# Altium PCB Helli5.PcbDoc
Units mm, origin at the board's own origin, x right, y up, seen from the top; angles counter-clockwise.
Board outline 89.66 x 105.54 mm, 2 copper layers (Top Layer, Bottom Layer); 35 components, 51 nets, 168 pads, 0 vias.
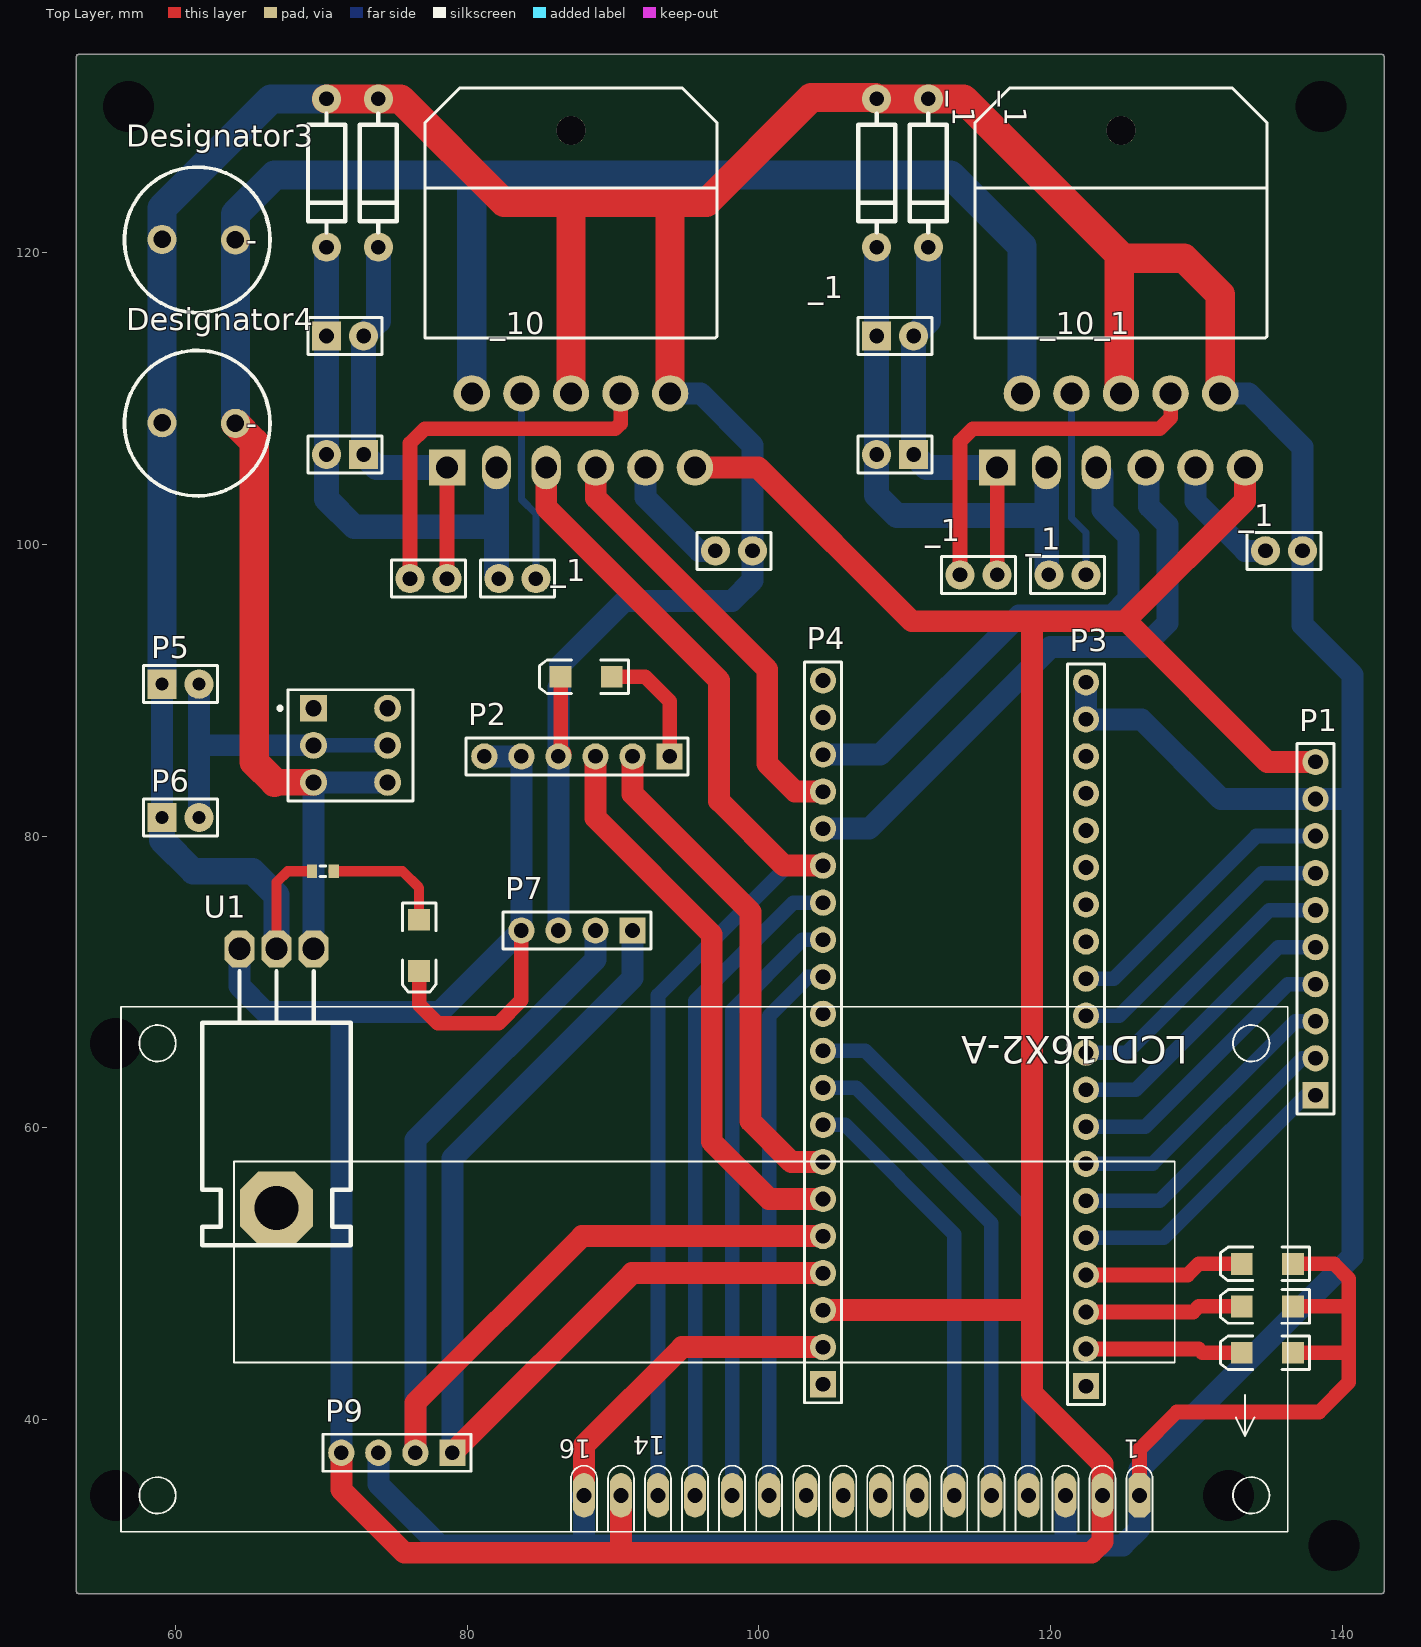
[diagram p0: Top Layer view]
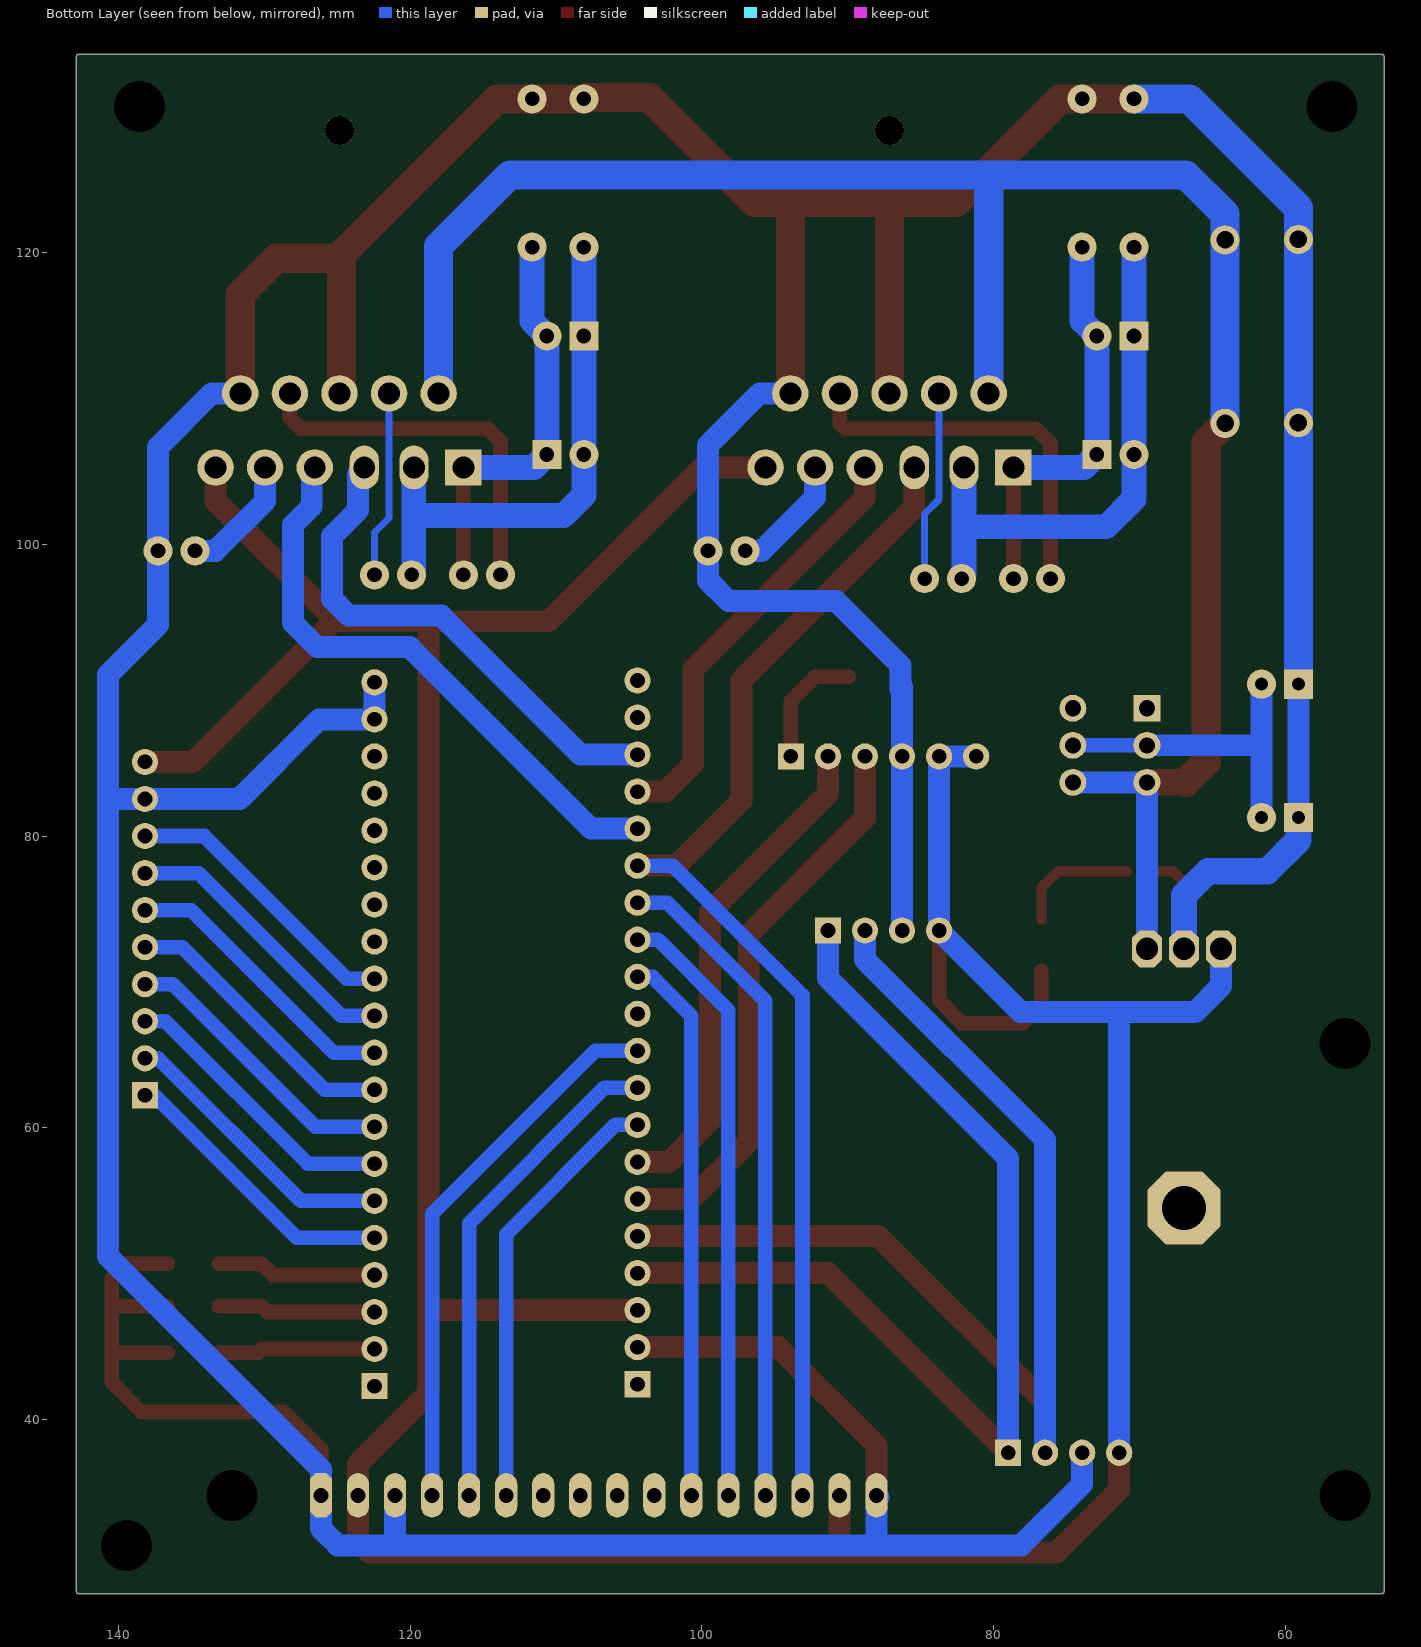
[diagram p1: Bottom Layer view, seen from below]

## Layer stack, top to bottom
Top Solder: solder mask 0.0102, Solder Resist, Dk 3.5
Top Layer: signal copper 0.0356
Dielectric 1: dielectric 0.32, FR-4, Dk 4.8
Bottom Layer: signal copper 0.0356
Bottom Solder: solder mask 0.0102, Solder Resist, Dk 3.5

## Board outline
53.213,28.194 ccw(c53.34,28.194) 53.34,28.067 142.748,28.067 ccw(c142.748,28.194) 142.875,28.194 142.875,133.477 ccw(c142.748,133.477) 142.748,133.604 53.34,133.604 ccw(c53.34,133.477) 53.213,133.477

## Design rules (kind name [scope] priority, off if disabled: settings)
Clearance [All] p1: gap=0.254 ignorepadtopadclearanceinfootprint=FALSE except(0: Arc-Hole Track-Hole SMDPad-Hole THPad-Hole Via-Hole Fill-Hole Poly-Hole Region-Hole Text-Hole)
PolygonConnect [All] p1: connectstyle=Relief reliefconductorwidth=0.254 reliefentries=4 polygonreliefangle="90 Angle" airgapwidth=0.254
RoutingVias [All] p1: holewidth=0.711 width=1.27 viastyle="Through Hole" minholewidth=0.711 minwidth=1.27 maxholewidth=0.711 maxwidth=1.27
SolderMaskExpansion [All] p1: expansion=0.102
Width Width_1 [(InNet('GND') OR InNet('VCC') OR InNet('VSS'))] p1: maxlimit=2 minlimit=0.1 preferedwidth=1.6
Width [All] p2: maxlimit=2 minlimit=0.1 preferedwidth=1
30 further rules are at their usual default settings.

## Classes and differential pairs
component class Sheet1: P1 P2 P4 P5 P6 P7 P9

## Components (designator, comment, footprint, x,y, rotation, side; value= is the part's Value field where it differs from the comment)
_1 "" DIODE0.4#1 108.077,130.556 r270 top
_1 "" DIODE0.4#2 111.633,130.556 r270 top
_1 "Header 2" HDR1X2#1 110.617,106.172 r180 top
_1 "Header 2" HDR1X2#2 108.077,114.3 r0 top
_1 "Cap" RAD-0.1#1 115.071,97.917 r0 top
_1 "Cap" RAD-0.1#2 121.167,97.917 r0 top
_1 "Cap" RAD-0.1#3 136.017,99.568 r0 top
_10 "MOTOR4" "L6203 SL" 87.122,116.84 r180 top
_10_1 "MOTOR4" "L6203 SL" 124.841,116.84 r180 top
Designator3 "Comment" "MY_CAP_POL 10MM" 61.595,120.904 r0 top
Designator4 "Comment" "MY_CAP_POL 10MM" 61.595,108.331 r0 top
P1 "Header 10" HDR1X10 138.176,62.23 r90 top
P2 "bluetooth" HDR1X6 93.882,85.471 r180 top
P3 "Header 20" HDR1X20 122.437,42.291 r90 top
P4 "Header 20" HDR1X20 104.405,42.418 r90 top
P5 "Header 2" HDR1X2#3 59.078,90.424 r0 top
P6 "Header 2" HDR1X2#3 59.078,81.28 r0 top
P7 "Header 4" HDR1X4 91.342,73.533 r180 top
P9 "Oled Dispaly" HDR1X4 78.994,37.719 r180 top
U1 "7805" My_TO-220 69.456,72.263 r180 top
? "Comment" 3.2X1.6X1.1 134.874,50.673 r180 top
? "Comment" 3.2X1.6X1.1 134.874,47.752 r180 top
? "Comment" 3.2X1.6X1.1 134.874,44.577 r180 top
? "Comment" 3.2X1.6X1.1 88.166,90.932 r180 top
? "Comment" J1-0603 70.104,77.597 r180 top
? "Comment" 3.2X1.6X1.1 76.708,72.517 r270 top
? "Comment" "My_LCD 16x2-A" 126.111,34.798 r180 top
? "" DIODE0.4#1 70.358,130.556 r270 top
? "" DIODE0.4#2 73.914,130.556 r270 top
? "Header 2" HDR1X2#1 72.898,106.172 r180 top
? "Header 2" HDR1X2#2 70.358,114.3 r0 top
? "Cap" RAD-0.1#1 77.352,97.663 r180 top
? "Cap" RAD-0.1#2 83.448,97.663 r0 top
? "Cap" RAD-0.1#3 98.298,99.568 r0 top
? "Comment" DPDT-6 72.009,86.233 r0 top

## Footprints (in the part's own frame and the unit in brackets; to place one, negate y for a bottom-side part, rotate by r counter-clockwise, add the part's x,y. Pads: shape width x height; smd on the part's side, far side on the other; paste and mask are expansions set on the pad)
3.2X1.6X1.1 [mm] "SMT LED; 2 Flat Leads"
  rect 1.5x1.5 smd: 1(-1.75,0) 2(1.75,0)
  silkscreen extent -2.9,-1.15 3.2,1.15
DIODE0.4#1 [mm]
  round 2 hole 1: 149(10.16,0) 150(0,0)
  silkscreen extent 1.02,-1.27 9.14,1.27
DIODE0.4#2 [mm]
  round 2 hole 1: 143(0,0) 144(10.16,0)
  silkscreen extent 1.02,-1.27 9.14,1.27
DPDT-6 [mm] "Switch; 6 Leads"
  rect 1.85x1.85 hole 1.1: 1(-2.54,2.54)
  round 1.85 hole 1.1: 2(-2.54,0) 3(-2.54,-2.54) 4(2.54,-2.54) 5(2.54,0) 6(2.54,2.54)
  silkscreen extent -4.96,-3.81 4.28,3.81
HDR1X2#1 [mm]
  rect 2x2 hole 1: 95(0,0)
  round 2 hole 1: 96(2.54,0)
  silkscreen extent -1.27,-1.27 3.81,1.27
HDR1X2#2 [mm]
  rect 2x2 hole 1: 93(0,0)
  round 2 hole 1: 94(2.54,0)
  silkscreen extent -1.27,-1.27 3.81,1.27
HDR1X2#3 [mm] "Connector; Header; 2 Position"
  rect 2x2 hole 0.9: 1(0,0)
  round 2 hole 0.9: 2(2.54,0)
  silkscreen extent -1.27,-1.27 3.81,1.27
HDR1X4 [mm] "Connector; Header; 4 Position"
  rect 1.8x1.8 hole 1: 1(0,0)
  round 1.8 hole 1: 2(2.54,0) 3(5.08,0) 4(7.62,0)
  silkscreen extent -1.27,-1.27 8.89,1.27
HDR1X6 [mm] "Connector; Header; 6 Position"
  rect 1.8x1.8 hole 1: 1(0,0)
  round 1.8 hole 1: 2(2.54,0) 3(5.08,0) 4(7.62,0) 5(10.16,0) 6(12.7,0)
  silkscreen extent -1.27,-1.27 13.97,1.27
HDR1X10 [mm] "Connector; Header; 10 Position"
  rect 1.8x1.8 hole 1: 1(0,0)
  round 1.8 hole 1: 2(2.54,0) 3(5.08,0) 4(7.62,0) 5(10.16,0) 6(12.7,0) 7(15.24,0) 8(17.78,0) 9(20.32,0) 10(22.86,0)
  silkscreen extent -1.27,-1.27 24.13,1.27
HDR1X20 [mm] "Connector; Header; 20 Position"
  rect 1.8x1.8 hole 1: 1(0,0)
  round 1.8 hole 1: 2(2.54,0) 3(5.08,0) 4(7.62,0) 5(10.16,0) 6(12.7,0) 7(15.24,0) 8(17.78,0) 9(20.32,0) 10(22.86,0) 11(25.4,0) 12(27.94,0) 13(30.48,0) 14(33.02,0) 15(35.56,0) 16(38.1,0) 17(40.64,0) 18(43.18,0) 19(45.72,0) 20(48.26,0)
  silkscreen extent -1.27,-1.27 49.53,1.27
J1-0603 [mm] "Chip Resistor, Body 1.6x0.8mm, IPC High Density"
  rect 0.7x0.9 smd: 1(-0.75,0) 2(0.75,0)
  silkscreen extent -0.2,-0.35 0.2,0.35, body extent -0.85,-0.48 0.85,0.48, height 0.9
"L6203 SL" [mm]
  round 2 hole 2: 0(0,-11.557)
  rect 2.5x2.5 hole 1.5: 1(8.5,11.557)
  round 2.5 hole 1.5: 2(6.8,6.477) 4(3.4,6.477) 6(0,6.477) 7(-1.7,11.557) 8(-3.4,6.477) 9(-5.1,11.557) 10(-6.8,6.477) 11(-8.5,11.557)
  oval 2x3 hole 1.5: 3(5.1,11.557) 5(1.7,11.557)
  silkscreen extent -10,-14.48 10,2.69
"MY_CAP_POL 10MM" [mm]
  round 2 hole 1.2: +(-2.517,0.02) -(2.517,-0.02)
  silkscreen extent -5.09,-5 4.89,4.98, body extent -5.13,-5.07 5.03,5.09, height 10.16
"My_LCD 16x2-A" [mil]
  oct 60x120 hole 40: 1(0,0)
  oval 60x120 hole 40: 2(100,0) 3(200,0) 4(300,0) 5(400,0) 6(500,0) 7(600,0) 8(700,0) 9(800,0) 10(900,0) 11(1000,0) 12(1100,0) 13(1200,0) 14(1300,0) 15(1400,0) 16(1500,0)
  silkscreen extent -400,-1319 2750,98, body extent -299,-1331 2870,106, height 808
My_TO-220 [mil]
  oct 196.85x196.85 hole 118.11: 0(99.49,699.49)
  oct 80x100 hole 60: 1(-0.5,-0.5) 2(99.5,-0.5) 3(199.5,-0.5)
  silkscreen extent -101,60 300,800
RAD-0.1#1 [mm]
  round 2 hole 1: 91(1.27,0) 92(-1.27,0)
  silkscreen extent -2.54,-1.27 2.54,1.27
RAD-0.1#2 [mm]
  round 2 hole 1: 89(1.27,0) 90(-1.27,0)
  silkscreen extent -2.54,-1.27 2.54,1.27
RAD-0.1#3 [mm]
  round 2 hole 1: 87(1.27,0) 88(-1.27,0)
  silkscreen extent -2.54,-1.27 2.54,1.27

## Part data
P1: "Header, 10-Pin", LatestRevisionDate=17-Jul-2002, LatestRevisionNote="Re-released for DXP Platform.", Publisher="Altium Limited"
P2: library part "Header 6", "Header, 6-Pin", LatestRevisionDate=17-Jul-2002, LatestRevisionNote="Re-released for DXP Platform.", Publisher="Altium Limited"
P3 P4: "Header, 20-Pin", LatestRevisionDate=17-Jul-2002, LatestRevisionNote="Re-released for DXP Platform.", Publisher="Altium Limited"
P5 P6: "Header, 2-Pin", LatestRevisionDate=17-Jul-2002, LatestRevisionNote="Re-released for DXP Platform.", Publisher="Altium Limited"
P7: "Header, 4-Pin", LatestRevisionDate=17-Jul-2002, LatestRevisionNote="Re-released for DXP Platform.", Publisher="Altium Limited"
P9: library part "Header 4", "Header, 4-Pin", LatestRevisionDate=17-Jul-2002, LatestRevisionNote="Re-released for DXP Platform.", Publisher="Altium Limited"
U1: "Regulator"

## Free pads (board coordinates)
  round 1.524 hole 3.5: 2(55.88,34.798) 2(55.88,65.786) 2(56.769,130.048) 2(132.207,34.798) 2(138.557,130.048) 2(139.446,31.369)

## Nets (pads, with @x,y where several pads share a name; then routed paths per layer and width w, separated by ;. In a path a pad name is that pad's centre, name@x,y a point inside that pad or via, vN(x,y) a via of type N, cw(c..) or ccw(c..) an arc to the next point about the centre after c; other vN are vias at no path point)
A0: P1.1 P3.5 | length 19.8
  Bottom Layer w1: P3.5 127.762,52.451 137.541,62.23 P1.1
A1: P1.2 P3.6 | length 19.8
  Bottom Layer w1: P3.6 127.508,54.991 137.287,64.77 P1.2
A2: P1.3 P3.7 | length 19.8
  Bottom Layer w1: P3.7 127,57.531 136.779,67.31 P1.3
A3: P1.4 P3.8 | length 19.8
  Bottom Layer w1: P3.8 126.492,60.071 136.271,69.85 P1.4
A4: P1.5 P3.9 | length 19.8
  Bottom Layer w1: P3.9 125.857,62.611 135.636,72.39 P1.5
A5: P1.6 P3.10 | length 19.8
  Bottom Layer w1: P3.10 125.222,65.151 135.001,74.93 P1.6
A6: P1.7 P3.11 | length 19.8
  Bottom Layer w1: P3.11 124.714,67.691 134.493,77.47 P1.7
A7: P1.8 P3.12 | length 19.8
  Bottom Layer w1: P3.12 124.333,70.231 134.112,80.01 P1.8
A8: _10_1.7 P4.16 | length 40.7
  Bottom Layer w1.5: P4.16 107.569,80.518 120.015,92.964 126.365,92.964 128.016,94.615 128.016,101.346 126.746,102.616 126.746,105.078 _10_1.7
A9: ?.14 _10.5 P4.15 | length 86
  Top Layer w1.5: _10.5 85.422,102.538 97.282,90.678 97.282,82.423 101.727,77.978 P4.15
  Bottom Layer w1: ?.14 93.091,69.088 101.981,77.978 P4.15
A10: ?.13 P4.14 | length 45.5
  Bottom Layer w1: ?.13 95.631,68.707 102.362,75.438 P4.14
A11: ?.12 P4.13 | length 41.5
  Bottom Layer w1: ?.12 98.171,68.072 102.997,72.898 P4.13
A12: ?.11 P4.12 | length 37.7
  Bottom Layer w1: ?.11 100.711,67.691 103.378,70.358 P4.12
A13: 
A14: 
A15: P4.11
B0: P3.13
B1: P3.14
B3: ?.4@118.491,34.798 P4.10 | length 38
  Bottom Layer w1: P4.10 107.315,65.278 118.491,54.102 ?.4@118.491,34.798
B4: ?.5@115.951,34.798 P4.9 | length 34.1
  Bottom Layer w1: P4.9 106.68,62.738 115.951,53.467 ?.5@115.951,34.798
B5: ?.6@113.411,34.798 P4.8 | length 30
  Bottom Layer w1: P4.8 105.918,60.198 113.411,52.705 ?.6@113.411,34.798
B6: P2.2 P4.7 | length 34.5
  Top Layer w1.5: P2.2 91.342,82.902 99.441,74.803 99.441,60.452 102.235,57.658 P4.7
B7: P2.3 P4.6 | length 39
  Top Layer w1.5: P2.3 88.802,81.251 96.774,73.279 96.774,59.055 100.711,55.118 P4.6
B8: P4.5 P7.2 P9.2 | length 77
  Top Layer w1.5: P9.2 76.454,41.148 87.884,52.578 P4.5
  Bottom Layer w1.5: P9.2 76.454,59.182 88.802,71.53 P7.2
B9: P4.4 P7.1 P9.1 | length 71.4
  Top Layer w1.5: P9.1 91.313,50.038 P4.4
  Bottom Layer w1.5: P9.1 78.994,57.912 91.342,70.26 P7.1
B10: P3.15
B11: P3.16
B12: P4.20
B13: P4.19
B14: _10_1.5 P4.18 | length 35.3
  Bottom Layer w1.5: P4.18 108.331,85.598 117.856,95.123 124.206,95.123 125.349,96.266 125.349,100.584 123.571,102.362 123.571,104.853 _10_1.5
B15: _10.7 P4.17 | length 29.8
  Top Layer w1.5: _10.7 88.822,103.202 100.584,91.44 100.584,84.963 102.489,83.058 P4.17
BOOT1.1: _1.89 _10_1.4 | length 12.9
  Bottom Layer w0.5: _10_1.4 121.441,101.825 122.437,100.829 _1.89
BOOT1.2: _1.92 _10_1.8 | length 25.9
  Top Layer w1: _1.92 113.801,107.07 114.681,107.95 127.508,107.95 128.241,108.683 _10_1.8
BOOT2.1: ?.89 _10.4 | length 13.1
  Bottom Layer w0.5: _10.4 83.722,103.095 84.718,102.099 ?.89
BOOT2.2: ?.91 _10.8 | length 26.3
  Top Layer w1: ?.91 76.082,106.943 77.089,107.95 90.17,107.95 90.522,108.302 _10.8
GND: ?.1@126.111,34.798 ?.1@136.624,44.577 ?.1@136.624,47.752 ?.1@136.624,50.673 ?.2@69.354,77.597 ?.2@86.416,90.932 ?.3@121.031,34.798 ?.16 ?.87 ?.143 ?.150 _1.87 _1.143 _1.150 _10.6 _10.10 _10_1.6 _10_1.10 Designator3.+ Designator4.+ P1.9 P2.4 P3.19 P3.20 P4.2 P5.1 P6.1 P7.3 P9.3 U1.2 | length 485.9
  Top Layer w0.7: U1.2 66.929,76.835 67.691,77.597 ?.2@69.354,77.597
  Top Layer w1: P2.4@86.416,85.625 ?.2@86.416,90.932 ; ?.1@126.111,34.798 126.111,37.973 128.651,40.513 138.43,40.513 140.462,42.545 140.462,44.577 ; ?.1@136.624,44.577 140.462,44.577 ; ?.1@136.624,47.752 140.462,47.752 ; ?.1@136.624,50.673 139.446,50.673 140.462,49.657 140.462,47.752 ; 140.462,44.577 140.462,47.752
  Top Layer w1.5: P2.4 P2.4@86.416,85.625 ; ?.16 88.011,38.227 94.742,44.958 P4.2
  Top Layer w2: ?.150 ?.143 75.438,130.556 82.55,123.444 86.868,123.444 ; _10.6 87.122,123.19 86.868,123.444 ; _10.10 93.922,123.444 ; _10_1.6 124.714,110.49 124.714,119.634 ; _10_1.10 131.641,117.152 129.159,119.634 124.714,119.634 ; 86.868,123.444 93.922,123.444 ; 93.922,123.444 96.393,123.444 103.6,130.651 107.982,130.651 _1.150 _1.143 114.046,130.556 124.714,119.888 124.714,119.634
  Bottom Layer w1.5: P6.1 P5.1 ; P9.3 73.914,35.56 78.105,31.369 88.011,31.369 ; P7.3 P2.4 86.262,90.199 ; 86.36,90.043 86.36,91.694 90.805,96.139 98.171,96.139 99.568,97.536 ?.87 99.568,106.807 96.012,110.363 _10.10 ; ?.16@87.884,34.671 ?.16 88.011,31.369 ; ?.3@121.031,34.798 121.031,31.496 121.158,31.369 ; P3.20 P3.19 126.238,88.011 131.699,82.55 P1.9 140.716,82.55 ; _10_1.10 133.604,110.363 137.287,106.68 _1.87 137.287,94.488 140.716,91.059 140.716,82.55 ; 88.011,31.369 121.158,31.369 ; 121.158,31.369 124.968,31.369 126.111,32.512 126.111,34.798 126.111,36.576 140.716,51.181 140.716,82.55
  Bottom Layer w1.8: P6.1 59.078,79.733 61.214,77.597 65.278,77.597 66.929,75.946 U1.2
  Bottom Layer w2: P5.1 Designator4.+ Designator3.+ 59.078,123.086 66.548,130.556 ?.150
LED: ?.1@70.854,77.597 ?.1@76.708,74.267 | length 8.5
  Top Layer w0.7: ?.1@70.854,77.597 75.565,77.597 76.708,76.454 ?.1@76.708,74.267
m1.1: _1.90 _1.93 _1.96 _1.149 _10_1.3 | length 36.7
  Bottom Layer w1.7: _1.149 _1.93 _1.96 108.077,103.378 109.474,101.981 119.741,101.981 ; _10_1.3 119.741,101.981 ; _1.90 119.741,98.073 119.741,101.981
m1.2: _1.91 _1.94 _1.95 _1.144 _10_1.1 | length 28.1
  Top Layer w1: _1.91 _10_1.1
  Bottom Layer w1.7: _1.144 111.633,115.316 _1.94 _1.95 111.506,105.283 _10_1.1
m2.1: ?.90 ?.93 ?.96 ?.149 _10.3 | length 37.4
  Bottom Layer w1.7: ?.149 ?.93 ?.96 70.358,103.124 72.263,101.219 82.022,101.219 ; _10.3 82.022,101.219 ; ?.90 82.022,97.819 82.022,101.219
m2.2: ?.92 ?.94 ?.95 ?.144 _10.1 | length 28.4
  Top Layer w1: ?.92 _10.1
  Bottom Layer w1.7: ?.144 73.914,115.316 ?.94 ?.95 73.787,105.283 _10.1
NetB1_2: 
NetD1_A: ?.2@133.124,50.673 P3.4 | length 11
  Top Layer w1: P3.4 129.413,49.911 130.175,50.673 ?.2@133.124,50.673
NetD2_A: ?.2@133.124,47.752 P3.3 | length 10.8
  Top Layer w1: P3.3 129.794,47.371 130.175,47.752 ?.2@133.124,47.752
NetD3_A: ?.2@133.124,44.577 P3.2 | length 10.8
  Top Layer w1: P3.2 130.175,44.831 130.429,44.577 ?.2@133.124,44.577
NetD4_A: ?.1@89.916,90.932 P2.1 | length 8.4
  Top Layer w1: ?.1@89.916,90.932 92.202,90.932 93.882,89.252 P2.1
VCC: ?.2@76.708,70.767 ?.2@123.571,34.798 ?.15 _10.11 _10_1.11 P1.10 P2.5 P2.6 P4.3 P7.4 P9.4 U1.3 | length 290.2
  Top Layer w1: ?.2@76.708,70.767 76.708,68.453 77.978,67.183 82.169,67.183 83.722,68.736 P7.4
  Top Layer w1.5: P9.4 71.374,35.179 75.692,30.861 90.551,30.861 ; ?.15 90.551,30.861 ; _10.11 99.949,105.283 110.49,94.742 118.745,94.742 ; P4.3 118.491,47.498 118.745,47.752 ; _10_1.11 133.341,102.988 125.158,94.805 ; P1.10 134.874,85.09 125.158,94.805 ; 90.551,30.861 122.809,30.861 123.571,31.623 123.571,34.798 123.571,36.957 118.745,41.783 118.745,47.752 ; 118.745,47.752 118.745,94.742 ; 118.745,94.742 125.095,94.742 125.158,94.805
  Bottom Layer w1.5: U1.3 64.389,69.723 66.167,67.945 71.247,67.945 ; P9.4 71.374,67.818 71.247,67.945 ; P2.6 P2.5 P7.4 78.134,67.945 71.247,67.945
VIN: ?.2@69.469,86.233 ?.5@74.549,86.233 P5.2 P6.2 | length 22.1
  Bottom Layer w1: 61.618,86.36 61.745,86.233 ; ?.2@69.469,86.233 ?.5@74.549,86.233
  Bottom Layer w1.5: P6.2 61.618,86.36 P5.2 ; 61.745,86.233 ?.2@69.469,86.233
VREF: _1.88 _10_1.9 | length 8.5
  Bottom Layer w1.5: _10_1.9 129.941,102.977 133.35,99.568 _1.88
VREF1: ?.88 _10.9 | length 8.4
  Bottom Layer w1.5: _10.9 92.222,103.231 95.885,99.568 ?.88
VSS: ?.3@69.469,83.693 ?.4@74.549,83.693 _10.2 _10_1.2 Designator3.- Designator4.- U1.1 | length 141.4
  Top Layer w1.8: 66.802,83.693 ?.3@69.469,83.693
  Top Layer w2: Designator4.- 65.405,107.018 65.405,85.09 66.802,83.693
  Bottom Layer w1.5: U1.1 69.469,83.693 ?.4@74.549,83.693
  Bottom Layer w2: Designator4.- Designator3.- 64.112,122.659 66.802,125.349 80.322,125.349 ; _10.2 80.322,125.349 ; _10_1.2 118.041,120.465 113.157,125.349 80.322,125.349
pads on no net: ?.1@69.469,88.773 ?.6@74.549,88.773 ?.7 ?.8 ?.9 ?.10 _10.0 _10_1.0 P3.1 P3.17 P3.18 P4.1 U1.0

## Silkscreen, mask and mechanical layers (free items; w line width, h text height)
Mechanical 1:
  lines w0.254: 53.34,28.194 142.748,28.194 142.748,133.477 53.34,133.477 53.34,28.194

## Text inside footprints (layer, text, board x,y; h text height)
Designator3: Top Overlay "-" at 64.842,120.151 h1.52
Designator4: Top Overlay "-" at 64.842,107.578 h1.52
?: Top Overlay "LCD 16X2-A" at 129.413,66.294 h1.91 r180; Top Overlay "16" at 88.519,38.608 h1.27 r180; Top Overlay "1" at 126.111,38.608 h1.27 r180; Top Overlay "14" at 93.599,38.862 h1.27 r180